# EAGLE board SensorBoard (EAGLE 5.10), part 1 of 6
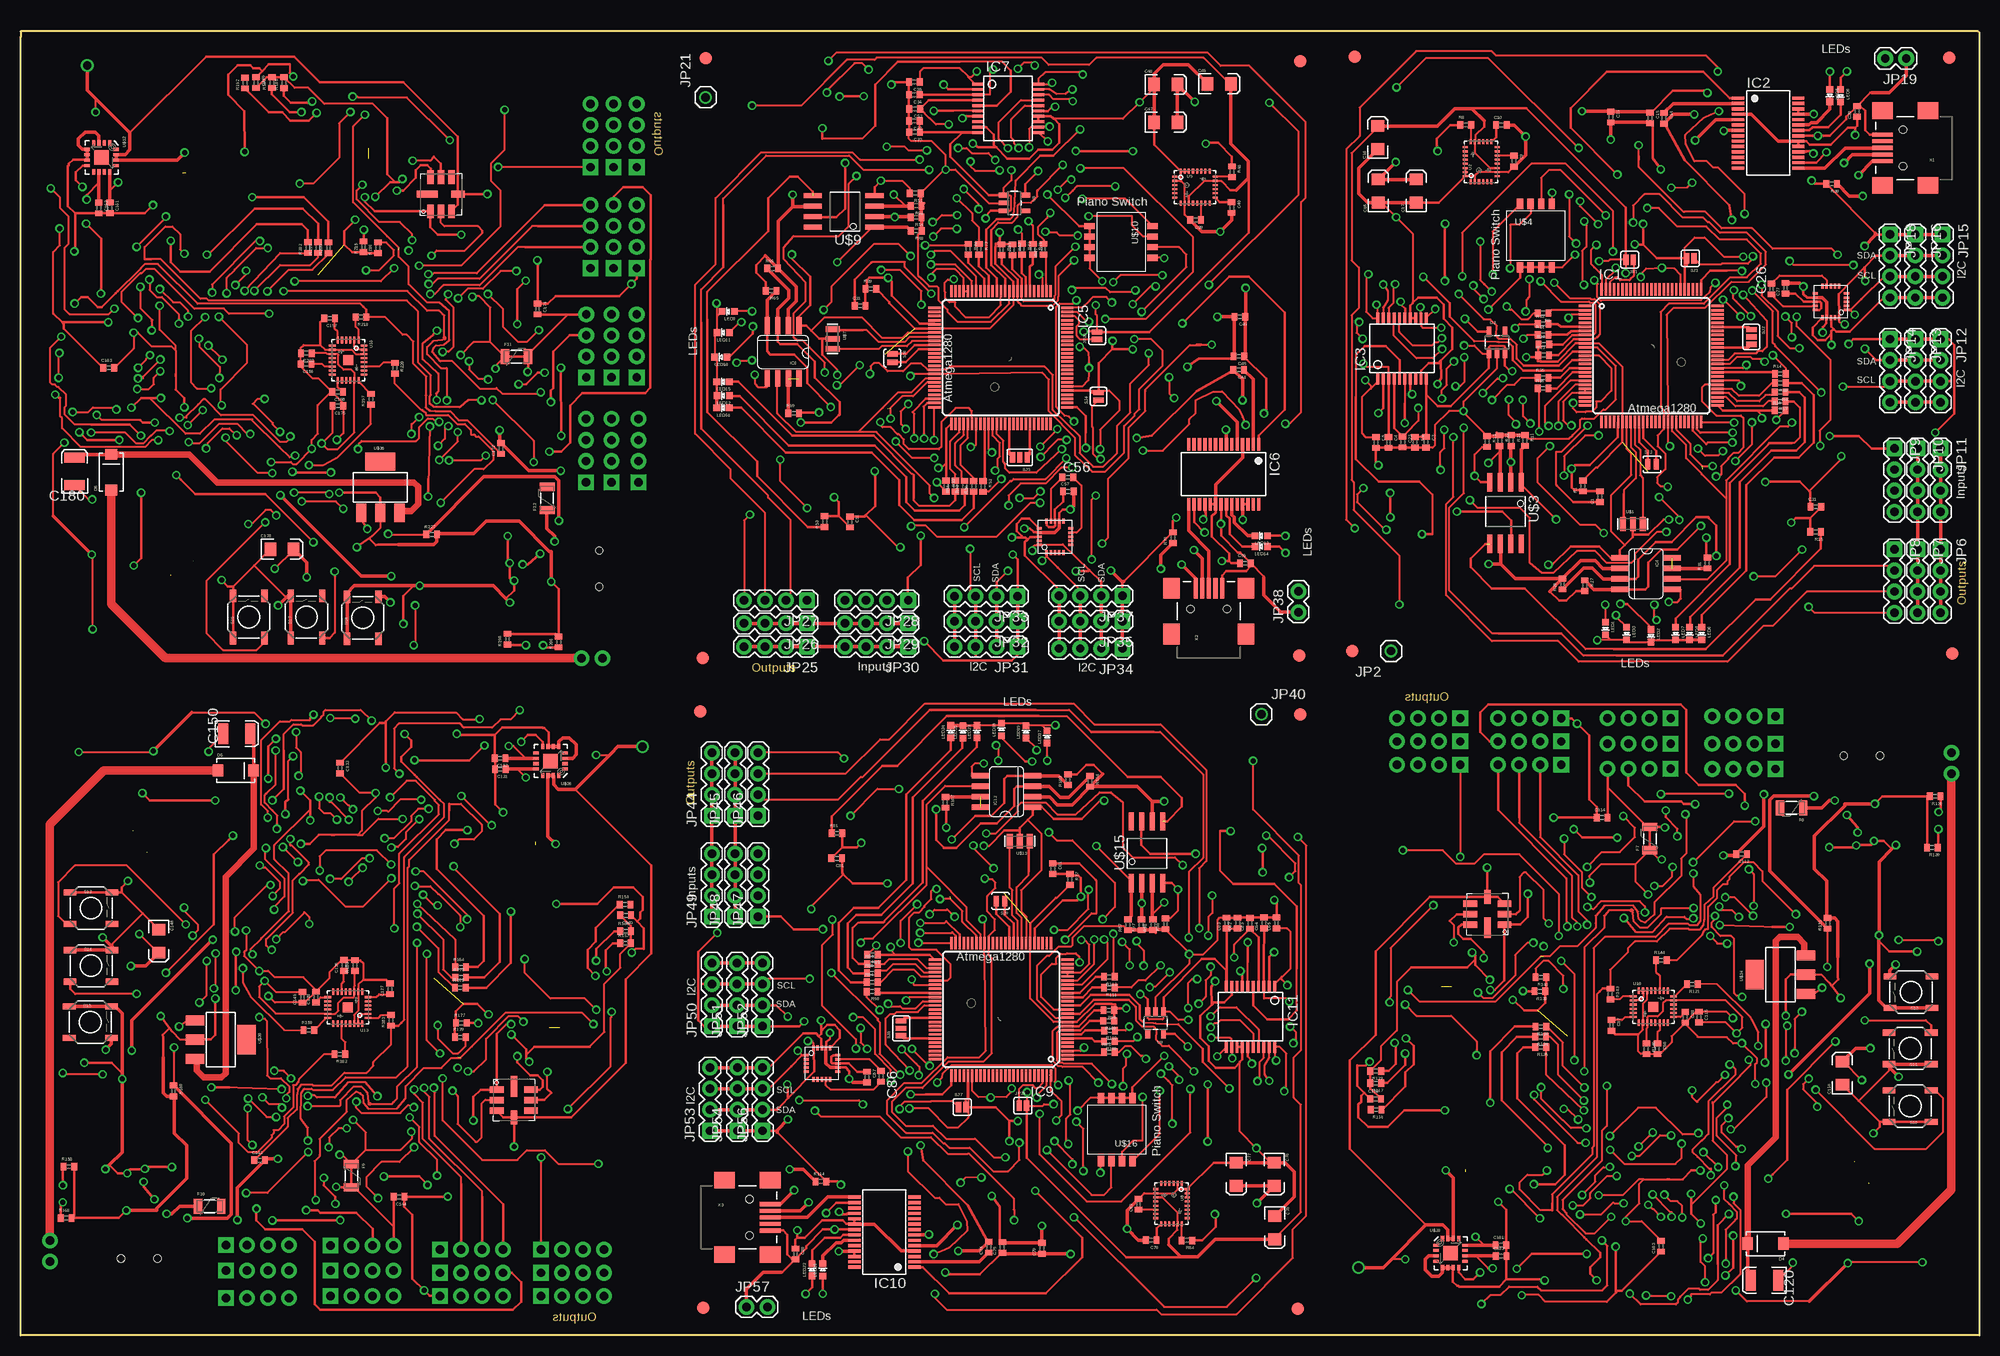
[diagram p0: board, top side]
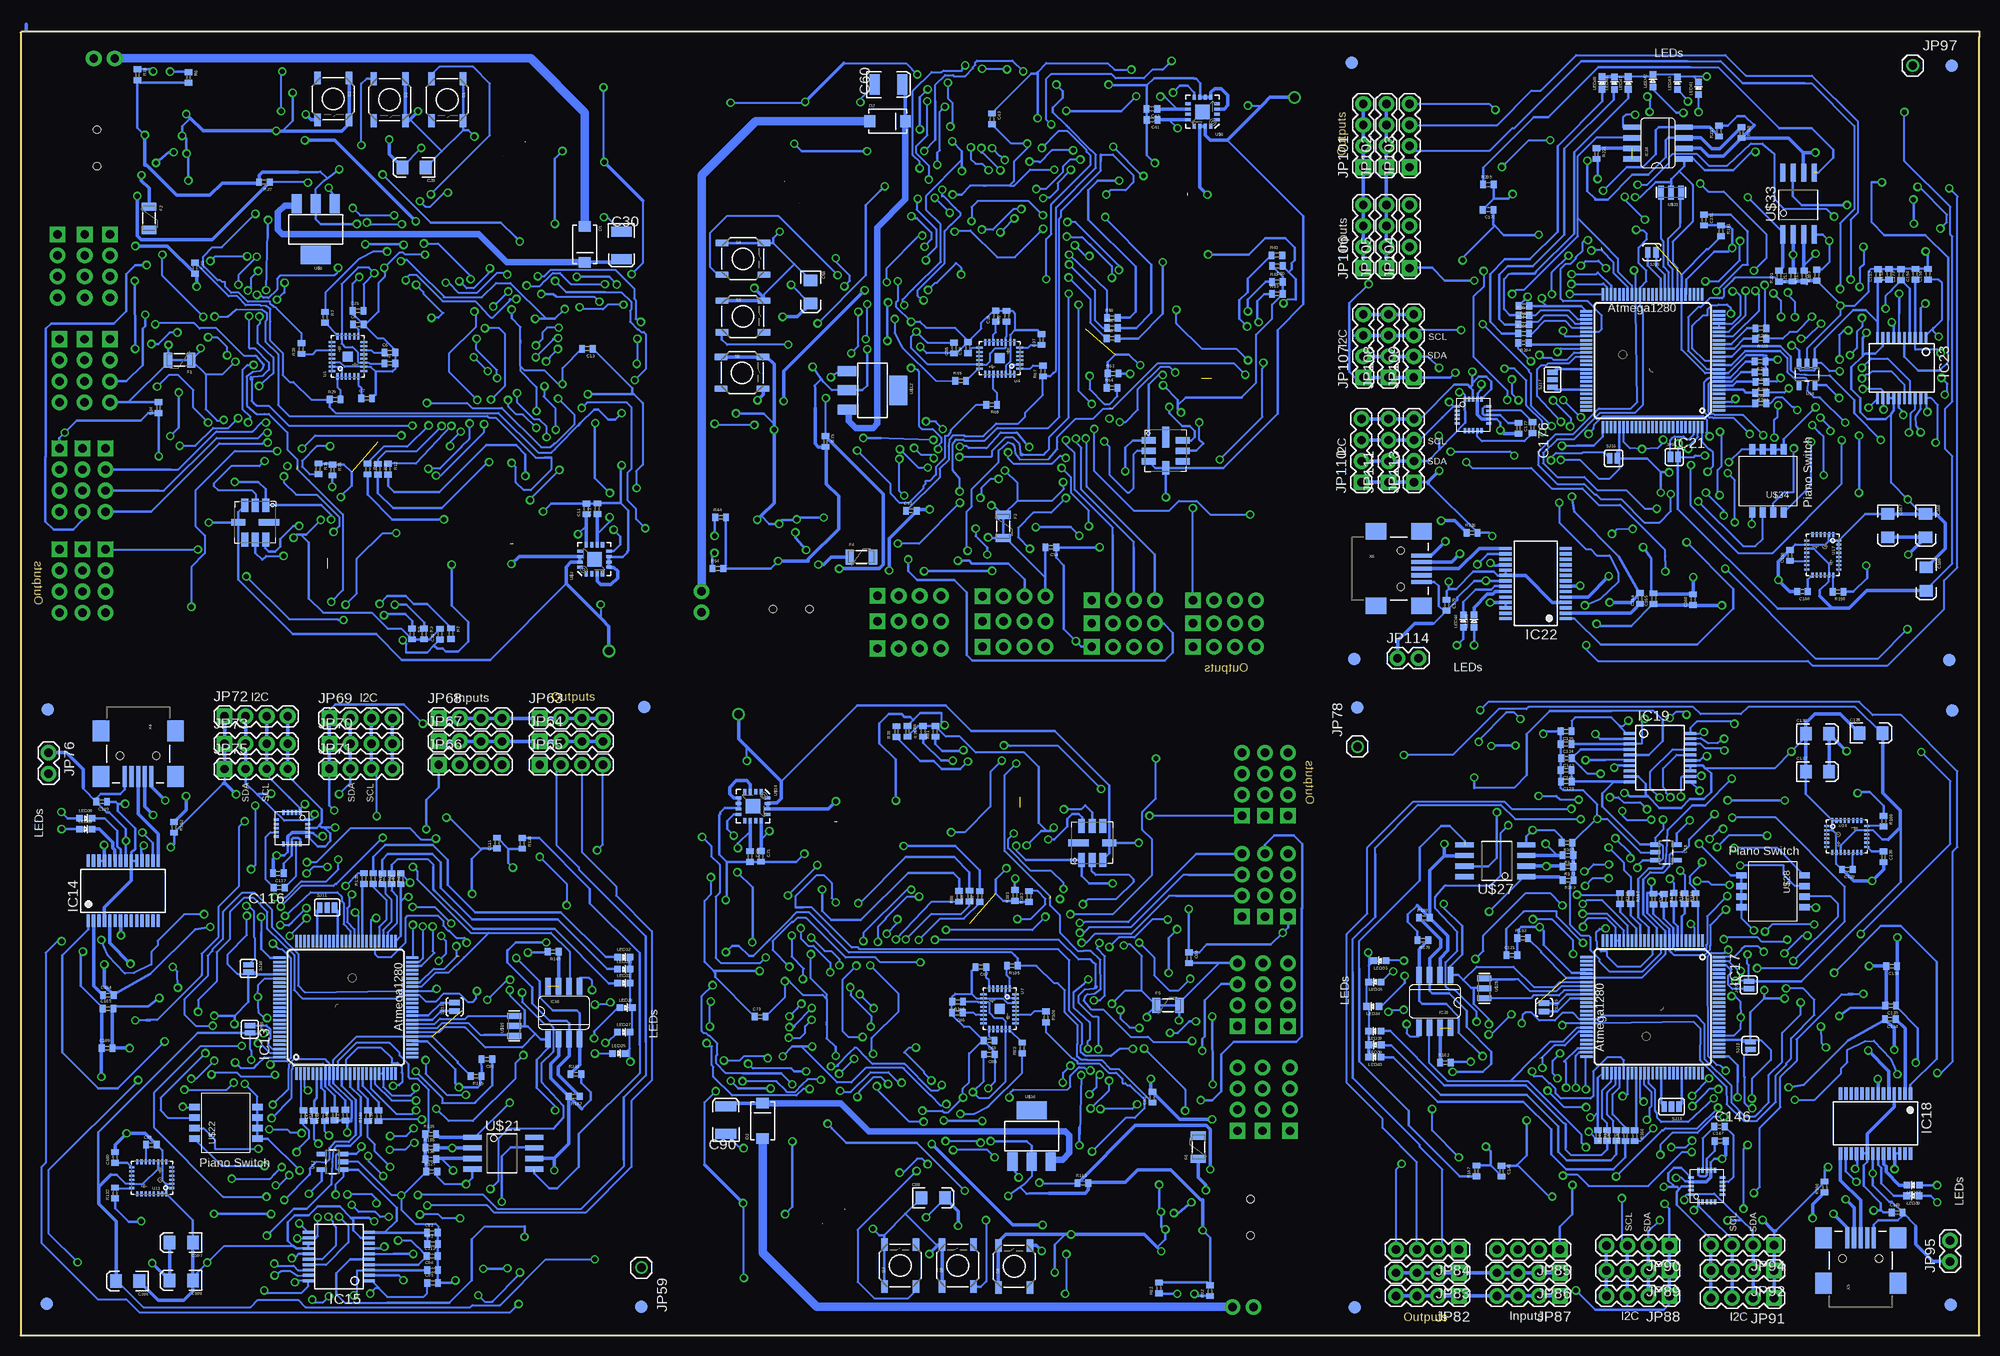
[diagram p1: board, bottom side, seen from below]

Size 236.38 x 157.44 mm. Coordinates in mm from the lower left corner, seen from the top.
Outline: 236.38,157.3 236.38,0 0,0 0,156.78
Outline: 236.25,157.44 0,157.44 0,156.74
Copper layers (1*16): Top 0.035mm / dielectric 1.5mm / Bottom 0.035mm
Design rules "default *": minimum track width 10mil, minimum drill 0.6mm, track to track 5mil, track to pad 5mil, pad to pad 5mil, via to via 5mil, smd to smd 5mil, copper to edge 40mil, drill to drill 8mil, minimum pad ring 10mil, minimum via ring 8mil, stop-mask expansion 4mil, vias tented up to drill 0mil, thermal gap 10mil

## Footprints (pad centres in the part's own frame; a part is rotated, then mirrored left to right if it is on the bottom)
C0402 = smd 0.7 x 0.9: 1 -0.65,0; 2 0.65,0
EIA3216 = smd 1.4 x 1.6: A 1.4,0; C -1.4,0
EIA3528 = smd 1.2 x 2.5: A 1.65,0; C -1.65,0
SMA-DIODE = smd 1.27 x 1.47: A -2.15,0; C 2.15,0
PTC-1206 = smd 1 x 1.8: 1 -1.4,0; 2 1.4,0
LPCC-20 = smd 0.61 x 0.305: 1 -1.9,1; 2 -1.9,0.5; 3 -1.9,0; 4 -1.9,-0.5; 5 -1.9,-1; 11 1.9,-1; 12 1.9,-0.5; 13 1.9,0; 14 1.9,0.5; 15 1.9,1 | smd 0.305 x 0.61: 6 -1,-1.9; 7 -0.5,-1.9; 8 0,-1.9; 9 0.5,-1.9; 10 1,-1.9; 16 1,1.9; 17 0.5,1.9; 18 0,1.9; 19 -0.5,1.9; 20 -1,1.9
TQFP100 = smd 1.5 x 0.3: 1 -8,6; 2 -8,5.5; 3 -8,5; 4 -8,4.5; 5 -8,4; 6 -8,3.5; 7 -8,3; 8 -8,2.5; 9 -8,2; 10 -8,1.5; 11 -8,1; 12 -8,0.5; 13 -8,0; 14 -8,-0.5; 15 -8,-1; 16 -8,-1.5; 17 -8,-2; 18 -8,-2.5; 19 -8,-3; 20 -8,-3.5; 21 -8,-4; 22 -8,-4.5; 23 -8,-5; 24 -8,-5.5; 25 -8,-6; 51 8,-6; 52 8,-5.5; 53 8,-5; 54 8,-4.5; 55 8,-4; 56 8,-3.5; 57 8,-3; 58 8,-2.5; 59 8,-2; 60 8,-1.5; 61 8,-1; 62 8,-0.5; 63 8,0; 64 8,0.5; 65 8,1; 66 8,1.5; 67 8,2; 68 8,2.5; 69 8,3; 70 8,3.5; 71 8,4; 72 8,4.5; 73 8,5; 74 8,5.5; 75 8,6 | smd 0.3 x 1.5: 26 -6,-8; 27 -5.5,-8; 28 -5,-8; 29 -4.5,-8; 30 -4,-8; 31 -3.5,-8; 32 -3,-8; 33 -2.5,-8; 34 -2,-8; 35 -1.5,-8; 36 -1,-8; 37 -0.5,-8; 38 0,-8; 39 0.5,-8; 40 1,-8; 41 1.5,-8; 42 2,-8; 43 2.5,-8; 44 3,-8; 45 3.5,-8; 46 4,-8; 47 4.5,-8; 48 5,-8; 49 5.5,-8; 50 6,-8; 76 6,8; 77 5.5,8; 78 5,8; 79 4.5,8; 80 4,8; 81 3.5,8; 82 3,8; 83 2.5,8; 84 2,8; 85 1.5,8; 86 1,8; 87 0.5,8; 88 0,8; 89 -0.5,8; 90 -1,8; 91 -1.5,8; 92 -2,8; 93 -2.5,8; 94 -3,8; 95 -3.5,8; 96 -4,8; 97 -4.5,8; 98 -5,8; 99 -5.5,8; 100 -6,8
SSOP28 = smd 0.4 x 1.5: 1 -4.225,-3.625; 2 -3.575,-3.625; 3 -2.925,-3.625; 4 -2.275,-3.625; 5 -1.625,-3.625; 6 -0.975,-3.625; 7 -0.325,-3.625; 8 0.325,-3.625; 9 0.975,-3.625; 10 1.625,-3.625; 11 2.275,-3.625; 12 2.925,-3.625; 13 3.575,-3.625; 14 4.225,-3.625; 15 4.225,3.625; 16 3.575,3.625; 17 2.925,3.625; 18 2.275,3.625; 19 1.625,3.625; 20 0.975,3.625; 21 0.325,3.625; 22 -0.325,3.625; 23 -0.975,3.625; 24 -1.625,3.625; 25 -2.275,3.625; 26 -2.925,3.625; 27 -3.575,3.625; 28 -4.225,3.625
SSOP20BU = smd 0.348 x 1.397: 1 -2.925,-3.656; 2 -2.275,-3.656; 3 -1.625,-3.656; 4 -0.975,-3.656; 5 -0.325,-3.656; 6 0.325,-3.656; 7 0.975,-3.656; 8 1.625,-3.656; 9 2.275,-3.656; 10 2.925,-3.656; 11 2.925,3.656; 12 2.275,3.656; 13 1.625,3.656; 14 0.975,3.656; 15 0.325,3.656; 16 -0.325,3.656; 17 -0.975,3.656; 18 -1.625,3.656; 19 -2.275,3.656; 20 -2.925,3.656
SOIC8 = smd 0.66 x 2.032: 1 -1.905,-3.175; 2 -0.635,-3.175; 3 0.635,-3.175; 4 1.905,-3.175; 5 1.905,3.175; 6 0.635,3.175; 7 -0.635,3.175; 8 -1.905,3.175
SJ_2S-NO = smd 0.635 x 1.27: 1 0,0; 2 0.889,0
1X01 = drill 1.016 round: 1 0,0
FIDUCIAL-1.5X3 = smd 1.5 x 1.5: 1 0,0
1X04 = drill 1.016 pad 1.88 square: 1 0,0 | drill 1.016 pad 1.88 round: 2 2.54,0; 3 5.08,0; 4 7.62,0
1X02 = drill 1.016 pad 1.88 round: 1 0,0; 2 2.54,0
LED-0603 = smd 0.8 x 0.8: A 0,-0.75; C 0,0.75
TACTILE_SWITCH_SMD = smd 1.524 x 0.762: 1 -2.54,1.905; 2 2.54,1.905; 3 -2.54,-1.905; 4 2.54,-1.905
SJ_2S = smd 0.635 x 1.27: 1 -0.45,0; 2 0.45,0
SJ_3 = smd 0.635 x 1.27: 1 -0.889,0; 2 0,0; 3 0.889,0
SJ_2S-NOTRACE = smd 0.635 x 1.27: 1 -0.508,0; 2 0.508,0
SPARKFUN_IDG500 = smd 0.8 x 0.25: 1 -2.417,1.25; 2 -2.417,0.75; 3 -2.417,0.25; 4 -2.417,-0.25; 5 -2.417,-0.75; 6 -2.417,-1.25; 15 2.433,-1.25; 16 2.433,-0.75; 17 2.433,-0.25; 18 2.433,0.25; 19 2.433,0.75; 20 2.433,1.25 | smd 0.25 x 0.8: 7 -1.742,-1.925; 8 -1.242,-1.925; 9 -0.742,-1.925; 10 -0.242,-1.925; 11 0.258,-1.925; 12 0.758,-1.925; 13 1.258,-1.925; 14 1.758,-1.925; 21 1.758,1.925; 22 1.258,1.925; 23 0.758,1.925; 24 0.258,1.925; 25 -0.242,1.925; 26 -0.742,1.925; 27 -1.242,1.925; 28 -1.742,1.925 | smd 1.2 x 1.2: NC 0,0
QFN-28_6X8 = smd 0.6 x 0.25: 1 -2.417,1.25; 2 -2.417,0.75; 3 -2.417,0.25; 4 -2.417,-0.25; 5 -2.417,-0.75; 6 -2.417,-1.25; 15 2.433,-1.25; 16 2.433,-0.75; 17 2.433,-0.25; 18 2.433,0.25; 19 2.433,0.75; 20 2.433,1.25 | smd 0.25 x 0.6: 7 -1.742,-1.925; 8 -1.242,-1.925; 9 -0.742,-1.925; 10 -0.242,-1.925; 11 0.258,-1.925; 12 0.758,-1.925; 13 1.258,-1.925; 14 1.758,-1.925; 21 1.758,1.925; 22 1.258,1.925; 23 0.758,1.925; 24 0.258,1.925; 25 -0.242,1.925; 26 -0.742,1.925; 27 -1.242,1.925; 28 -1.742,1.925
SOT23-5 = smd 0.55 x 1.2: 1 -0.95,-1.3; 2 0,-1.3; 3 0.95,-1.3; 4 0.95,1.3; 5 -0.95,1.3
RESONATOR-SMD = smd 0.7 x 1.7: 1 -1.2,0; 2 0,0; 3 1.2,0
LFCSP-16 = smd 1.75 x 1.75: 0 0,0 | smd 0.65 x 0.37: 1 -1.75,0.975; 2 -1.75,0.325; 3 -1.75,-0.325; 4 -1.75,-0.975; 9 1.75,-0.975; 10 1.75,-0.325; 11 1.75,0.325; 12 1.75,0.975 | smd 0.37 x 0.65: 5 -0.975,-1.75; 6 -0.325,-1.75; 7 0.325,-1.75; 8 0.975,-1.75; 13 0.975,1.75; 14 0.325,1.75; 15 -0.325,1.75; 16 -0.975,1.75
SO08WIDE = smd 0.61 x 2.21: 1 -1.905,-3.569; 2 -0.635,-3.569; 3 0.635,-3.569; 4 1.905,-3.569; 5 1.905,3.886; 6 0.635,3.886; 7 -0.635,3.886; 8 -1.905,3.886
CHP-041TB = smd 0.76 x 1.27: 1 -1.905,-3.81; 2 -0.635,-3.81; 3 0.635,-3.81; 4 1.905,-3.81; 5 1.905,3.81; 6 0.635,3.81; 7 -0.635,3.81; 8 -1.905,3.81
BMP085 = smd 1.67 x 0.8: 1 -2.065,1.27; 2 -2.065,0; 3 -2.065,-1.27; 5 2.065,-1.27; 6 2.065,0; 7 2.065,1.27 | smd 0.8 x 1.67: 4 0,-2.065 | smd 0.8 x 2.5: 8 0,1.65
SOT223 = smd 1.219 x 2.235: 1 -2.311,-3.099; 2 0,-3.099; 3 2.311,-3.099 | smd 3.6 x 2.2: 4 0,3.099
USB-MINIB = smd 2.5 x 0.5: D+ 2.5,0; D- 2.5,0.8; GND 2.5,-1.6; ID 2.5,-0.8; VBUS 2.5,1.6 | smd 2.5 x 2: GND@1 -3,-4.5; GND@2 -3,4.5; GND@3 2.5,4.5; GND@4 2.5,-4.5 | hole 0.9: 0,2.2; 0,-2.2

## Placement (x,y rotation side)
C1  .1uF  [C0402]  190.59,101.25 90 top
C2  .1uF  [C0402]  168.26,107.81 270 top
C3  .1uF  [C0402]  169.61,107.83 270 top
C4  .1uF  [C0402]  165.09,107.8 270 top
C5  .1uF  [C0402]  163.56,107.8 270 top
C6  .1uF  [C0402]  191.82,118.65 0 bottom
C7  .22uF  [C0402]  194.64,113.11 0 bottom
C8  .22uF  [C0402]  195.62,122.03 0 bottom
C9  .1uF  [C0402]  180.23,141.75 270 top
C10  .22uF  [C0402]  178.71,146.11 0 top
C11  .1uF  [C0402]  168.12,99.77 90 bottom
C12  .1uF  [C0402]  166.79,99.8 90 bottom
C13  .1uF  [C0402]  168,119.12 180 bottom
C14  .1uF or 240 ohms  [C0402]  198.31,146.94 270 top
C15  .1uF  [C0402]  196.67,146.97 270 top
C16  10uF  [EIA3216]  163.78,144.6 90 top
C17  10uF  [EIA3216]  168.43,138.14 90 top
C18  10uF  [EIA3216]  163.85,138.14 90 top
C19  .1uF  [C0402]  191.9,147.09 270 top
C20  .1uF  [C0402]  185.77,84.66 90 bottom
C21  .1uF  [C0402]  216.66,100.01 0 top
C22  .1uF  [C0402]  215.34,128.84 270 bottom
C23  .1uF  [C0402]  166.79,107.85 270 top
C24  1uF  [C0402]  219.74,112 90 bottom
C25  2.2uF  [C0402]  195.66,123.67 0 bottom
C26  0.22µF  [C0402]  211.29,126.31 90 top
C27  4.7uF  [C0402]  213,126.4 90 top
C28  10uF  [EIA3216]  188.89,141 180 bottom
C29  .1uF  [C0402]  221.65,147.76 90 top
C30  100uF  [EIA3528]  163.86,131.59 270 bottom
C31  .1uF  [C0402]  101.3,124.28 0 top
C32  .1uF  [C0402]  107.86,146.6 180 top
C33  .1uF  [C0402]  107.88,145.25 180 top
C34  .1uF  [C0402]  107.85,149.78 180 top
C35  .1uF  [C0402]  107.85,151.3 180 top
C36  .1uF  [C0402]  118.7,123.05 90 bottom
C37  .22uF  [C0402]  113.16,120.22 90 bottom
C38  .22uF  [C0402]  122.08,119.24 90 bottom
C39  .1uF  [C0402]  141.8,134.64 180 top
C40  .22uF  [C0402]  146.16,136.16 270 top
C41  .1uF  [C0402]  99.82,146.75 180 bottom
C42  .1uF  [C0402]  99.85,148.08 180 bottom
C43  .1uF  [C0402]  119.17,146.87 270 bottom
C44  .1uF or 240 ohms  [C0402]  146.99,116.56 180 top
C45  .1uF  [C0402]  147.02,118.2 180 top
C46  10uF  [EIA3216]  144.65,151.09 0 top
C47  10uF  [EIA3216]  138.19,146.44 0 top
C48  10uF  [EIA3216]  138.19,151.01 0 top
C49  .1uF  [C0402]  147.14,122.96 180 top
C50  .1uF  [C0402]  84.71,129.09 180 bottom
C51  .1uF  [C0402]  100.06,98.21 270 top
C52  .1uF  [C0402]  128.89,99.53 0 bottom
C53  .1uF  [C0402]  107.9,148.07 180 top
C54  1uF  [C0402]  112.05,95.12 180 bottom
C55  2.2uF  [C0402]  123.72,119.21 90 bottom
C56  0.22µF  [C0402]  126.36,103.58 0 top
C57  4.7uF  [C0402]  126.45,101.87 0 top
C58  10uF  [EIA3216]  141.05,125.97 270 bottom
C59  .1uF  [C0402]  147.81,93.22 0 top
C60  100uF  [EIA3528]  131.64,151.01 0 bottom
C61  .1uF  [C0402]  124.55,56.33 270 top
C62  .1uF  [C0402]  146.88,49.78 90 top
C63  .1uF  [C0402]  145.53,49.76 90 top
C64  .1uF  [C0402]  150.05,49.79 90 top
C65  .1uF  [C0402]  151.58,49.79 90 top
C66  .1uF  [C0402]  123.32,38.93 180 bottom
C67  .22uF  [C0402]  120.5,44.47 180 bottom
C68  .22uF  [C0402]  119.52,35.56 180 bottom
C69  .1uF  [C0402]  134.91,15.84 90 top
C70  .22uF  [C0402]  136.43,11.48 180 top
C71  .1uF  [C0402]  147.02,57.82 270 bottom
C72  .1uF  [C0402]  148.35,57.79 270 bottom
C73  .1uF  [C0402]  147.14,38.47 0 bottom
C74  .1uF or 240 ohms  [C0402]  116.83,10.65 90 top
C75  .1uF  [C0402]  118.47,10.62 90 top
C76  10uF  [EIA3216]  151.36,12.99 270 top
C77  10uF  [EIA3216]  146.71,19.44 270 top
C78  10uF  [EIA3216]  151.29,19.44 270 top
C79  .1uF  [C0402]  123.24,10.5 90 top
C80  .1uF  [C0402]  129.37,72.93 270 bottom
C81  .1uF  [C0402]  98.48,57.58 180 top
C82  .1uF  [C0402]  99.8,28.75 90 bottom
C83  .1uF  [C0402]  148.35,49.74 90 top
C84  1uF  [C0402]  95.4,45.59 270 bottom
C85  2.2uF  [C0402]  119.48,33.91 180 bottom
C86  0.22µF  [C0402]  103.85,31.27 270 top
C87  4.7uF  [C0402]  102.14,31.18 270 top
C88  10uF  [EIA3216]  126.25,16.59 0 bottom
C89  .1uF  [C0402]  93.49,9.83 270 top
C90  100uF  [EIA3528]  151.28,25.99 90 bottom
C91  .1uF  [C0402]  180.12,33.36 180 bottom
C92  .1uF  [C0402]  186.67,11.03 0 bottom
C93  .1uF  [C0402]  186.69,12.38 0 bottom
C94  .1uF  [C0402]  186.67,7.86 0 bottom
C95  .1uF  [C0402]  186.67,6.33 0 bottom
C96  .1uF  [C0402]  197.52,34.59 270 top
C97  .22uF  [C0402]  191.98,37.41 270 top
C98  .22uF  [C0402]  200.89,38.39 270 top
C99  .1uF  [C0402]  220.62,23 0 bottom
C100  .22uF  [C0402]  224.97,21.48 90 bottom
C101  .1uF  [C0402]  178.64,10.89 0 top
C102  .1uF  [C0402]  178.67,9.56 0 top
C103  .1uF  [C0402]  197.99,10.77 90 top
C104  .1uF or 240 ohms  [C0402]  225.8,41.08 0 bottom
C105  .1uF  [C0402]  225.84,39.44 0 bottom
C106  10uF  [EIA3216]  223.47,6.55 180 bottom
C107  10uF  [EIA3216]  217.01,11.2 180 bottom
C108  10uF  [EIA3216]  217.01,6.62 180 bottom
C109  .1uF  [C0402]  225.96,34.67 0 bottom
C110  .1uF  [C0402]  163.53,28.55 0 top
C111  .1uF  [C0402]  178.88,59.43 90 bottom
C112  .1uF  [C0402]  207.71,58.11 180 top
C113  .1uF  [C0402]  186.71,9.56 0 bottom
C114  1uF  [C0402]  190.87,62.52 0 top
C115  2.2uF  [C0402]  202.54,38.43 270 top
C116  0.22µF  [C0402]  205.18,54.06 180 bottom
C117  4.7uF  [C0402]  205.27,55.77 180 bottom
C118  10uF  [EIA3216]  219.86,31.66 90 top
C119  .1uF  [C0402]  226.63,64.42 180 bottom
C120  100uF  [EIA3528]  210.46,6.63 180 top
C121  .1uF  [C0402]  56.41,45.89 0 bottom
C122  .1uF  [C0402]  49.86,68.21 180 bottom
C123  .1uF  [C0402]  49.84,66.86 180 bottom
C124  .1uF  [C0402]  49.87,71.39 180 bottom
C125  .1uF  [C0402]  49.87,72.91 180 bottom
C126  .1uF  [C0402]  39.01,44.65 90 top
C127  .22uF  [C0402]  44.55,41.83 90 top
C128  .22uF  [C0402]  35.64,40.85 90 top
C129  .1uF  [C0402]  15.92,56.24 180 bottom
C130  .22uF  [C0402]  11.56,57.76 270 bottom
C131  .1uF  [C0402]  57.9,68.35 180 top
C132  .1uF  [C0402]  57.87,69.68 180 top
C133  .1uF  [C0402]  38.55,68.47 270 top
C134  .1uF or 240 ohms  [C0402]  10.73,38.16 180 bottom
C135  .1uF  [C0402]  10.69,39.81 180 bottom
C136  10uF  [EIA3216]  13.06,72.69 0 bottom
C137  10uF  [EIA3216]  19.52,68.05 0 bottom
C138  10uF  [EIA3216]  19.52,72.62 0 bottom
C139  .1uF  [C0402]  10.58,44.57 180 bottom
C140  .1uF  [C0402]  73.01,50.7 180 top
C141  .1uF  [C0402]  57.66,19.81 270 bottom
C142  .1uF  [C0402]  28.83,21.13 0 top
C143  .1uF  [C0402]  49.82,69.68 180 bottom
C144  1uF  [C0402]  45.67,16.73 180 top
C145  2.2uF  [C0402]  33.99,40.81 90 top
C146  0.22µF  [C0402]  31.35,25.18 0 bottom
C147  4.7uF  [C0402]  31.26,23.47 0 bottom
C148  10uF  [EIA3216]  16.67,47.58 270 top
C149  .1uF  [C0402]  9.91,14.83 0 bottom
C150  100uF  [EIA3528]  26.07,72.61 0 top
C151  .1uF  [C0402]  33.21,134.65 270 bottom
C152  .1uF  [C0402]  10.89,128.1 90 bottom
C153  .1uF  [C0402]  12.24,128.08 90 bottom
C154  .1uF  [C0402]  7.72,128.1 90 bottom
C155  .1uF  [C0402]  6.19,128.1 90 bottom
C156  .1uF  [C0402]  34.45,117.25 180 top
C157  .22uF  [C0402]  37.27,122.79 180 top
C158  .22uF  [C0402]  38.25,113.88 180 top
C159  .1uF  [C0402]  22.86,94.15 90 bottom
C160  .22uF  [C0402]  21.34,89.8 180 bottom
C161  .1uF  [C0402]  10.75,136.13 270 top
C162  .1uF  [C0402]  9.42,136.1 270 top
C163  .1uF  [C0402]  10.63,116.78 0 top
C164  .1uF or 240 ohms  [C0402]  40.94,88.97 90 bottom
C165  .1uF  [C0402]  39.3,88.93 90 bottom
C166  10uF  [EIA3216]  6.41,91.3 270 bottom
C167  10uF  [EIA3216]  11.06,97.76 270 bottom
C168  10uF  [EIA3216]  6.48,97.76 270 bottom
C169  .1uF  [C0402]  34.53,88.81 90 bottom
C170  .1uF  [C0402]  28.4,151.24 270 top
C171  .1uF  [C0402]  59.29,135.89 180 bottom
C172  .1uF  [C0402]  57.97,107.06 90 top
C173  .1uF  [C0402]  9.42,128.06 90 bottom
C174  1uF  [C0402]  62.37,123.9 270 top
C175  2.2uF  [C0402]  38.29,112.23 180 top
C176  0.22µF  [C0402]  53.92,109.59 270 bottom
C177  4.7uF  [C0402]  55.63,109.5 270 bottom
C178  10uF  [EIA3216]  31.52,94.91 0 top
C179  .1uF  [C0402]  64.28,88.15 270 bottom
C180  100uF  [EIA3528]  6.49,104.31 90 top
D1  [SMA-DIODE]  168.29,131.71 270 bottom
D2  [SMA-DIODE]  131.76,146.57 0 bottom
D3  [SMA-DIODE]  146.85,25.88 90 bottom
D4  [SMA-DIODE]  210.58,11.07 180 top
D5  [SMA-DIODE]  25.96,68.18 0 top
D6  [SMA-DIODE]  10.92,104.19 90 top
F1  PTC 500mA  [PTC-1206]  217.2,117.75 180 bottom
F2  PTCSMD  [PTC-1206]  220.9,134.87 270 bottom
F3  PTC 500mA  [PTC-1206]  117.8,97.66 270 bottom
F4  PTCSMD  [PTC-1206]  134.92,93.97 0 bottom
F5  PTC 500mA  [PTC-1206]  97.94,39.83 0 bottom
F6  PTCSMD  [PTC-1206]  94.24,22.72 90 bottom
F7  PTC 500mA  [PTC-1206]  196.62,59.97 90 top
F8  PTCSMD  [PTC-1206]  213.74,63.67 180 top
F9  PTC 500mA  [PTC-1206]  39.91,19.27 270 top
F10  PTCSMD  [PTC-1206]  22.8,15.57 0 top
F11  PTC 500mA  [PTC-1206]  59.83,118.15 0 top
F12  PTCSMD  [PTC-1206]  63.53,101.03 90 top
HMC1  HMC5843  [LPCC-20]  218.46,124.78 180 top
HMC2  HMC5843  [LPCC-20]  124.83,96.41 90 top
HMC3  HMC5843  [LPCC-20]  96.68,32.81 0 top
HMC4  HMC5843  [LPCC-20]  203.64,61.23 270 bottom
HMC5  HMC5843  [LPCC-20]  32.89,18.02 90 bottom
HMC6  HMC5843  [LPCC-20]  61.09,111.13 0 bottom
IC1  ATMEGA1280-16AU  [TQFP100]  196.81,118.26 0 top
IC2  FT232RL  [SSOP28]  210.9,145.14 270 top
IC3  ADS7844  [SSOP20BU]  166.73,119.13 0 top
IC4  [SOIC8]  196.16,91.95 270 top
IC5  ATMEGA1280-16AU  [TQFP100]  118.31,118.06 270 top
IC6  FT232RL  [SSOP28]  145.19,103.96 180 top
IC7  ADS7844  [SSOP20BU]  119.18,148.14 270 top
IC8  [SOIC8]  92,118.71 180 top
IC9  ATMEGA1280-16AU  [TQFP100]  118.33,39.33 180 top
IC10  FT232RL  [SSOP28]  104.24,12.45 90 top
IC11  ADS7844  [SSOP20BU]  148.41,38.46 180 top
IC12  [SOIC8]  118.98,65.63 90 top
IC13  ATMEGA1280-16AU  [TQFP100]  197.12,39.58 90 bottom
IC14  FT232RL  [SSOP28]  224.01,53.67 0 bottom
IC15  ADS7844  [SSOP20BU]  197.99,9.5 90 bottom
IC16  [SOIC8]  170.82,38.93 0 bottom
IC17  ATMEGA1280-16AU  [TQFP100]  39.41,39.66 270 bottom
IC18  FT232RL  [SSOP28]  12.53,25.57 180 bottom
IC19  ADS7844  [SSOP20BU]  38.54,69.75 270 bottom
IC20  [SOIC8]  65.71,40.31 180 bottom
IC21  ATMEGA1280-16AU  [TQFP100]  39.44,117.65 180 bottom
IC22  FT232RL  [SSOP28]  53.53,90.76 90 bottom
IC23  ADS7844  [SSOP20BU]  9.36,116.78 180 bottom
IC24  [SOIC8]  38.79,143.95 90 bottom
JP1  [SJ_2S-NO]  194.63,129.86 180 top
JP2  M01PTH  [1X01]  165.4,82.61 180 top
JP3  FIDUCIAL1.5X3  [FIDUCIAL-1.5X3]  232.78,154.24 180 top
JP4  FIDUCIAL1.5X3  [FIDUCIAL-1.5X3]  160.69,82.61 180 top
JP5  FIDUCIAL1.5X3  [FIDUCIAL-1.5X3]  233.1,82.29 180 top
JP6  [1X04]  231.72,94.87 270 top
JP7  [1X04]  228.93,94.87 270 top
JP8  [1X04]  226.13,94.87 270 top
JP9  [1X04]  226.13,107.06 270 top
JP10  [1X04]  228.93,107.06 270 top
JP11  [1X04]  231.72,107.06 270 top
JP12  [1X04]  231.72,120.27 270 top
JP13  [1X04]  228.67,120.27 270 top
JP14  [1X04]  225.62,120.27 270 top
JP15  [1X04]  231.95,132.9 270 top
JP16  [1X04]  228.65,132.9 270 top
JP17  FIDUCIAL1.5X3  [FIDUCIAL-1.5X3]  161.02,154.38 180 top
JP18  [1X04]  225.6,132.9 270 top
JP19  [1X02]  227.57,154.15 180 top
JP20  [SJ_2S-NO]  129.91,120.24 90 top
JP21  M01PTH  [1X01]  82.66,149.46 90 top
JP22  FIDUCIAL1.5X3  [FIDUCIAL-1.5X3]  154.29,82.09 90 top
JP23  FIDUCIAL1.5X3  [FIDUCIAL-1.5X3]  82.66,154.17 90 top
JP24  FIDUCIAL1.5X3  [FIDUCIAL-1.5X3]  82.34,81.76 90 top
JP25  [1X04]  94.92,83.15 180 top
JP26  [1X04]  94.92,85.94 180 top
JP27  [1X04]  94.92,88.73 180 top
JP28  [1X04]  107.11,88.73 180 top
JP29  [1X04]  107.11,85.94 180 top
JP30  [1X04]  107.11,83.15 180 top
JP31  [1X04]  120.32,83.15 180 top
JP32  [1X04]  120.32,86.19 180 top
JP33  [1X04]  120.32,89.24 180 top
JP34  [1X04]  132.95,82.92 180 top
JP35  [1X04]  132.95,86.22 180 top
JP36  FIDUCIAL1.5X3  [FIDUCIAL-1.5X3]  154.43,153.85 90 top
JP37  [1X04]  132.95,89.27 180 top
JP38  [1X02]  154.2,87.3 90 top
JP39  [SJ_2S-NO]  120.51,27.73 0 top
JP40  M01PTH  [1X01]  149.74,74.98 0 top
JP41  FIDUCIAL1.5X3  [FIDUCIAL-1.5X3]  82.36,3.35 0 top
JP42  FIDUCIAL1.5X3  [FIDUCIAL-1.5X3]  154.45,74.98 0 top
JP43  FIDUCIAL1.5X3  [FIDUCIAL-1.5X3]  82.04,75.3 0 top
JP44  [1X04]  83.42,62.72 90 top
JP45  [1X04]  86.21,62.72 90 top
JP46  [1X04]  89.01,62.72 90 top
JP47  [1X04]  89.01,50.52 90 top
JP48  [1X04]  86.21,50.52 90 top
JP49  [1X04]  83.42,50.52 90 top
JP50  [1X04]  83.42,37.32 90 top
JP51  [1X04]  86.47,37.32 90 top
JP52  [1X04]  89.52,37.32 90 top
JP53  [1X04]  83.19,24.69 90 top
JP54  [1X04]  86.49,24.69 90 top
JP55  FIDUCIAL1.5X3  [FIDUCIAL-1.5X3]  154.12,3.21 0 top
JP56  [1X04]  89.54,24.69 90 top
JP57  [1X02]  87.57,3.43 0 top
JP58  [SJ_2S-NO]  208.73,37.4 270 bottom
JP59  M01PTH  [1X01]  161.48,8.17 270 bottom
JP60  FIDUCIAL1.5X3  [FIDUCIAL-1.5X3]  233.11,75.55 270 bottom
JP61  FIDUCIAL1.5X3  [FIDUCIAL-1.5X3]  161.48,3.46 270 bottom
JP62  FIDUCIAL1.5X3  [FIDUCIAL-1.5X3]  161.15,75.87 270 bottom
JP63  [1X04]  173.74,74.49 0 bottom
JP64  [1X04]  173.74,71.7 0 bottom
JP65  [1X04]  173.74,68.9 0 bottom
JP66  [1X04]  185.93,68.9 0 bottom
JP67  [1X04]  185.93,71.7 0 bottom
JP68  [1X04]  185.93,74.49 0 bottom
JP69  [1X04]  199.14,74.49 0 bottom
JP70  [1X04]  199.14,71.44 0 bottom
JP71  [1X04]  199.14,68.39 0 bottom
JP72  [1X04]  211.77,74.72 0 bottom
JP73  [1X04]  211.77,71.42 0 bottom
JP74  FIDUCIAL1.5X3  [FIDUCIAL-1.5X3]  233.24,3.79 270 bottom
JP75  [1X04]  211.77,68.37 0 bottom
JP76  [1X02]  233.02,70.34 270 bottom
JP77  [SJ_2S-NO]  27.81,41.85 90 bottom
JP78  M01PTH  [1X01]  75.06,71.07 90 bottom
JP79  FIDUCIAL1.5X3  [FIDUCIAL-1.5X3]  3.43,3.69 90 bottom
JP80  FIDUCIAL1.5X3  [FIDUCIAL-1.5X3]  75.06,75.78 90 bottom
JP81  FIDUCIAL1.5X3  [FIDUCIAL-1.5X3]  75.38,3.37 90 bottom
JP82  [1X04]  62.8,4.75 180 bottom
JP83  [1X04]  62.8,7.55 180 bottom
JP84  [1X04]  62.8,10.34 180 bottom
JP85  [1X04]  50.6,10.34 180 bottom
JP86  [1X04]  50.6,7.55 180 bottom
JP87  [1X04]  50.6,4.75 180 bottom
JP88  [1X04]  37.4,4.75 180 bottom
JP89  [1X04]  37.4,7.8 180 bottom
JP90  [1X04]  37.4,10.85 180 bottom
JP91  [1X04]  24.76,4.52 180 bottom
JP92  [1X04]  24.76,7.82 180 bottom
JP93  FIDUCIAL1.5X3  [FIDUCIAL-1.5X3]  3.29,75.46 90 bottom
JP94  [1X04]  24.76,10.87 180 bottom
JP95  [1X02]  3.51,8.9 90 bottom
JP96  [SJ_2S-NO]  37.26,106.04 0 bottom
JP97  M01PTH  [1X01]  8.03,153.29 0 bottom
JP98  FIDUCIAL1.5X3  [FIDUCIAL-1.5X3]  75.41,81.66 0 bottom
JP99  FIDUCIAL1.5X3  [FIDUCIAL-1.5X3]  3.32,153.29 0 bottom
JP100  FIDUCIAL1.5X3  [FIDUCIAL-1.5X3]  75.73,153.62 0 bottom
JP101  [1X04]  74.35,141.03 90 bottom
JP102  [1X04]  71.56,141.03 90 bottom
JP103  [1X04]  68.76,141.03 90 bottom
JP104  [1X04]  68.76,128.84 90 bottom
JP105  [1X04]  71.56,128.84 90 bottom
JP106  [1X04]  74.35,128.84 90 bottom
JP107  [1X04]  74.35,115.63 90 bottom
JP108  [1X04]  71.3,115.63 90 bottom
JP109  [1X04]  68.25,115.63 90 bottom
JP110  [1X04]  74.58,103 90 bottom
JP111  [1X04]  71.28,103 90 bottom
JP112  FIDUCIAL1.5X3  [FIDUCIAL-1.5X3]  3.64,81.53 0 bottom
JP113  [1X04]  68.23,103 90 bottom
JP114  [1X02]  70.2,81.75 0 bottom
LED1  RED  [LED-0603]  191.26,85.33 180 top
LED2  BLUE  [LED-0603]  196.77,84.45 180 top
LED3  BLUE  [LED-0603]  193.81,84.73 180 top
LED4  YELLOW  [LED-0603]  201.41,84.73 180 top
LED5  ORANGE  [LED-0603]  218.34,149.68 180 top
LED6  ORANGE  [LED-0603]  219.64,149.66 180 top
LED7  GREEN  [LED-0603]  199.74,84.71 180 top
LED8  RED  [LED-0603]  202.89,84.71 180 top
LED9  RED  [LED-0603]  85.38,123.61 90 top
LED10  BLUE  [LED-0603]  84.5,118.1 90 top
LED11  BLUE  [LED-0603]  84.78,121.05 90 top
LED12  YELLOW  [LED-0603]  84.78,113.45 90 top
LED13  ORANGE  [LED-0603]  149.73,96.53 90 top
LED14  ORANGE  [LED-0603]  149.71,95.23 90 top
LED15  GREEN  [LED-0603]  84.76,115.13 90 top
LED16  RED  [LED-0603]  84.76,111.98 90 top
LED17  RED  [LED-0603]  123.88,72.25 0 top
LED18  BLUE  [LED-0603]  118.37,73.13 0 top
LED19  BLUE  [LED-0603]  121.33,72.86 0 top
LED20  YELLOW  [LED-0603]  113.73,72.85 0 top
LED21  ORANGE  [LED-0603]  96.8,7.91 0 top
LED22  ORANGE  [LED-0603]  95.5,7.93 0 top
LED23  GREEN  [LED-0603]  115.4,72.88 0 top
LED24  RED  [LED-0603]  112.25,72.88 0 top
LED25  RED  [LED-0603]  164.2,34.03 270 bottom
LED26  BLUE  [LED-0603]  163.32,39.54 270 bottom
LED27  BLUE  [LED-0603]  163.6,36.58 270 bottom
LED28  YELLOW  [LED-0603]  163.6,44.18 270 bottom
LED29  ORANGE  [LED-0603]  228.55,61.11 270 bottom
LED30  ORANGE  [LED-0603]  228.53,62.41 270 bottom
LED31  GREEN  [LED-0603]  163.58,42.51 270 bottom
LED32  RED  [LED-0603]  163.58,45.66 270 bottom
LED33  RED  [LED-0603]  72.33,45.22 90 bottom
LED34  BLUE  [LED-0603]  73.21,39.71 90 bottom
LED35  BLUE  [LED-0603]  72.94,42.66 90 bottom
LED36  YELLOW  [LED-0603]  72.93,35.06 90 bottom
LED37  ORANGE  [LED-0603]  7.99,18.13 90 bottom
LED38  ORANGE  [LED-0603]  8.01,16.84 90 bottom
LED39  GREEN  [LED-0603]  72.96,36.73 90 bottom
LED40  RED  [LED-0603]  72.96,33.58 90 bottom
LED41  RED  [LED-0603]  33.89,150.57 0 bottom
LED42  BLUE  [LED-0603]  39.4,151.45 0 bottom
LED43  BLUE  [LED-0603]  36.44,151.17 0 bottom
LED44  YELLOW  [LED-0603]  44.04,151.17 0 bottom
LED45  ORANGE  [LED-0603]  60.97,86.22 0 bottom
LED46  ORANGE  [LED-0603]  62.27,86.25 0 bottom
LED47  GREEN  [LED-0603]  42.37,151.19 0 bottom
LED48  RED  [LED-0603]  45.52,151.19 0 bottom
R1  10k  [C0402]  188.53,102.55 90 top
R2  1k  [C0402]  184.46,84.71 270 bottom
R3  1k  [C0402]  187.68,84.67 270 bottom
R4  1k  [C0402]  212.35,113.87 180 top
R5  1k  [C0402]  189.15,84.67 270 bottom
R6  1k  [C0402]  216.12,151.86 270 bottom
R7  750  [C0402]  199.64,122.9 270 bottom
R8  750  [C0402]  174.4,146.12 0 top
R9  1k  [C0402]  183.75,123.41 180 top
R10  4.7k  [C0402]  194.51,104.61 270 bottom
R11  10k  [C0402]  181.53,108.03 270 top
R12  4.7k  [C0402]  192.03,104.58 270 bottom
R13  10k  [C0402]  176.99,107.91 270 top
R14  4.7k  [C0402]  212.38,116.08 0 top
R15  1k  [C0402]  216.62,96.98 180 top
R16  1k  [C0402]  222.3,152.19 270 bottom
R17  1k  [C0402]  212.34,112.76 180 top
R18  1k  [C0402]  212.37,114.97 180 top
R19  1k  [C0402]  212.34,111.65 0 top
R20  4.7k  [C0402]  193.26,104.57 270 bottom
R21  10k  [C0402]  179.89,108.02 270 top
R22  10k  [C0402]  178.49,108.01 270 top
R23  10k  [C0402]  183.81,118.33 0 top
R24  10k  [C0402]  183.82,119.63 0 top
R25  10k  [C0402]  198.75,104.48 270 bottom
R26  10k  [C0402]  200.47,104.61 270 bottom
R27  10k  [C0402]  188.76,90.51 270 top
R28  10k  [C0402]  186.08,90.71 90 top
R29  750  [C0402]  198.44,112.98 0 bottom
R30  750  [C0402]  202.52,119.15 90 bottom
R31  200k  [C0402]  203.55,93.24 90 top
R32  750  [C0402]  191.84,117.33 0 bottom
R33  1k  [C0402]  183.75,122.1 0 top
R34  1k  [C0402]  183.73,120.79 0 top
R35  1k  [C0402]  183.74,115.6 0 top
R36  1k  [C0402]  183.74,114.31 0 top
R37  240  [C0402]  206.96,139.22 180 bottom
R38  720  [C0402]  218.57,139.01 180 top
R39  10k  [C0402]  102.6,126.34 0 top
R40  1k  [C0402]  84.76,130.4 0 bottom
R41  1k  [C0402]  84.72,127.18 0 bottom
R42  1k  [C0402]  113.92,102.52 90 top
R43  1k  [C0402]  84.72,125.72 0 bottom
R44  1k  [C0402]  151.91,98.75 0 bottom
R45  750  [C0402]  122.95,115.23 0 bottom
R46  750  [C0402]  146.18,140.46 270 top
R47  1k  [C0402]  123.46,131.12 90 top
R48  4.7k  [C0402]  104.66,120.36 0 bottom
R49  10k  [C0402]  108.08,133.34 180 top
R50  4.7k  [C0402]  104.63,122.84 0 bottom
R51  10k  [C0402]  107.96,137.88 180 top
R52  4.7k  [C0402]  116.13,102.49 270 top
R53  1k  [C0402]  97.03,98.24 90 top
R54  1k  [C0402]  152.24,92.57 0 bottom
R55  1k  [C0402]  112.81,102.53 90 top
R56  1k  [C0402]  115.02,102.5 90 top
R57  1k  [C0402]  111.7,102.53 270 top
R58  4.7k  [C0402]  104.62,121.6 0 bottom
R59  10k  [C0402]  108.07,134.97 180 top
R60  10k  [C0402]  108.06,136.37 180 top
R61  10k  [C0402]  118.38,131.06 270 top
R62  10k  [C0402]  119.68,131.04 270 top
R63  10k  [C0402]  104.53,116.11 0 bottom
R64  10k  [C0402]  104.66,114.4 0 bottom
R65  10k  [C0402]  90.56,126.1 180 top
R66  10k  [C0402]  90.76,128.79 0 top
R67  750  [C0402]  113.03,116.43 90 bottom
R68  750  [C0402]  119.2,112.35 180 bottom
R69  200k  [C0402]  93.29,111.31 0 top
R70  750  [C0402]  117.38,123.03 90 bottom
R71  1k  [C0402]  122.15,131.12 270 top
R72  1k  [C0402]  120.84,131.14 270 top
R73  1k  [C0402]  115.65,131.12 270 top
R74  1k  [C0402]  114.36,131.13 270 top
R75  240  [C0402]  139.27,107.91 270 bottom
R76  720  [C0402]  139.06,96.3 90 top
R77  10k  [C0402]  126.61,55.04 270 top
R78  1k  [C0402]  130.68,72.88 90 bottom
R79  1k  [C0402]  127.46,72.92 90 bottom
R80  1k  [C0402]  102.79,43.71 0 top
R81  1k  [C0402]  125.99,72.91 90 bottom
R82  1k  [C0402]  99.02,5.73 90 bottom
R83  750  [C0402]  115.5,34.69 90 bottom
R84  750  [C0402]  140.74,11.46 180 top
R85  1k  [C0402]  131.39,34.18 0 top
R86  4.7k  [C0402]  120.63,52.98 90 bottom
R87  10k  [C0402]  133.61,49.55 90 top
R88  4.7k  [C0402]  123.11,53 90 bottom
R89  10k  [C0402]  138.15,49.68 90 top
R90  4.7k  [C0402]  102.76,41.51 180 top
R91  1k  [C0402]  98.52,60.61 0 top
R92  1k  [C0402]  92.84,5.4 90 bottom
R93  1k  [C0402]  102.8,44.83 0 top
R94  1k  [C0402]  102.77,42.62 0 top
R95  1k  [C0402]  102.8,45.94 180 top
R96  4.7k  [C0402]  121.88,53.02 90 bottom
R97  10k  [C0402]  135.25,49.57 90 top
R98  10k  [C0402]  136.65,49.58 90 top
R99  10k  [C0402]  131.33,39.25 180 top
R100  10k  [C0402]  131.32,37.96 180 top
R101  10k  [C0402]  116.39,53.1 90 bottom
R102  10k  [C0402]  114.67,52.98 90 bottom
R103  10k  [C0402]  126.38,67.08 90 top
R104  10k  [C0402]  129.06,66.88 270 top
R105  750  [C0402]  116.7,44.61 180 bottom
R106  750  [C0402]  112.62,38.44 270 bottom
R107  200k  [C0402]  111.59,64.35 270 top
R108  750  [C0402]  123.3,40.26 180 bottom
R109  1k  [C0402]  131.39,35.49 180 top
R110  1k  [C0402]  131.41,36.79 180 top
R111  1k  [C0402]  131.4,41.98 180 top
R112  1k  [C0402]  131.4,43.28 180 top
R113  240  [C0402]  108.18,18.37 0 bottom
R114  720  [C0402]  96.57,18.58 0 top
R115  10k  [C0402]  181.42,31.3 180 bottom
R116  1k  [C0402]  163.58,27.23 180 top
R117  1k  [C0402]  163.54,30.45 180 top
R118  1k  [C0402]  192.74,55.12 270 bottom
R119  1k  [C0402]  163.54,31.92 180 top
R120  1k  [C0402]  230.73,58.89 180 top
R121  750  [C0402]  201.77,42.41 180 top
R122  750  [C0402]  224.99,17.17 90 bottom
R123  1k  [C0402]  202.27,26.52 270 bottom
R124  4.7k  [C0402]  183.47,37.28 180 top
R125  10k  [C0402]  186.9,24.3 0 bottom
R126  4.7k  [C0402]  183.45,34.8 180 top
R127  10k  [C0402]  186.77,19.76 0 bottom
R128  4.7k  [C0402]  194.95,55.15 90 bottom
R129  1k  [C0402]  175.85,59.39 270 bottom
R130  1k  [C0402]  231.06,65.07 180 top
R131  1k  [C0402]  191.63,55.11 270 bottom
R132  1k  [C0402]  193.83,55.14 270 bottom
R133  1k  [C0402]  190.51,55.11 90 bottom
R134  4.7k  [C0402]  183.44,36.03 180 top
R135  10k  [C0402]  186.88,22.66 0 bottom
R136  10k  [C0402]  186.88,21.26 0 bottom
R137  10k  [C0402]  197.2,26.58 90 bottom
R138  10k  [C0402]  198.5,26.59 90 bottom
R139  10k  [C0402]  183.35,41.52 180 top
R140  10k  [C0402]  183.48,43.24 180 top
R141  10k  [C0402]  169.38,31.53 0 bottom
R142  10k  [C0402]  169.57,28.85 180 bottom
R143  750  [C0402]  191.84,41.21 270 top
R144  750  [C0402]  198.01,45.29 0 top
R145  200k  [C0402]  172.11,46.32 180 bottom
R146  750  [C0402]  196.2,34.61 270 top
R147  1k  [C0402]  200.97,26.52 90 bottom
R148  1k  [C0402]  199.66,26.5 90 bottom
R149  1k  [C0402]  194.47,26.51 90 bottom
R150  1k  [C0402]  193.18,26.51 90 bottom
R151  240  [C0402]  218.08,49.73 90 top
R152  720  [C0402]  217.88,61.34 270 bottom
R153  10k  [C0402]  55.12,47.94 0 bottom
R154  1k  [C0402]  72.96,52.01 0 top
R155  1k  [C0402]  73,48.79 0 top
R156  1k  [C0402]  43.79,24.12 90 bottom
R157  1k  [C0402]  72.99,47.33 0 top
R158  1k  [C0402]  5.81,20.36 0 top
R159  750  [C0402]  34.77,36.84 0 top
R160  750  [C0402]  11.54,62.07 270 bottom
R161  1k  [C0402]  34.26,52.72 90 bottom
R162  4.7k  [C0402]  53.06,41.96 0 top
R163  10k  [C0402]  49.63,54.94 180 bottom
R164  4.7k  [C0402]  53.08,44.45 0 top
R165  10k  [C0402]  49.76,59.49 180 bottom
R166  4.7k  [C0402]  41.59,24.09 270 bottom
R167  1k  [C0402]  60.68,19.85 90 bottom
R168  1k  [C0402]  5.48,14.17 0 top
R169  1k  [C0402]  44.91,24.13 90 bottom
R170  1k  [C0402]  42.7,24.1 90 bottom
R171  1k  [C0402]  46.02,24.13 270 bottom
R172  4.7k  [C0402]  53.1,43.21 0 top
R173  10k  [C0402]  49.65,56.58 180 bottom
R174  10k  [C0402]  49.66,57.98 180 bottom
R175  10k  [C0402]  39.33,52.66 270 bottom
R176  10k  [C0402]  38.04,52.65 270 bottom
R177  10k  [C0402]  53.18,37.72 0 top
R178  10k  [C0402]  53.05,36.01 0 top
R179  10k  [C0402]  67.16,47.71 180 bottom
R180  10k  [C0402]  66.96,50.39 0 bottom
R181  750  [C0402]  44.69,38.03 90 top
R182  750  [C0402]  38.52,33.95 180 top
R183  200k  [C0402]  64.43,32.92 0 bottom
R184  750  [C0402]  40.34,44.63 90 top
R185  1k  [C0402]  35.57,52.72 270 bottom
R186  1k  [C0402]  36.87,52.74 270 bottom
R187  1k  [C0402]  42.06,52.73 270 bottom
R188  1k  [C0402]  43.36,52.73 270 bottom
R189  240  [C0402]  18.45,29.51 270 top
R190  720  [C0402]  18.66,17.9 90 bottom
R191  10k  [C0402]  31.16,133.35 270 bottom
R192  1k  [C0402]  27.09,151.19 90 top
R193  1k  [C0402]  30.31,151.23 90 top
R194  1k  [C0402]  54.98,122.03 0 bottom
R195  1k  [C0402]  31.78,151.23 90 top
R196  1k  [C0402]  58.75,84.04 90 top
R197  750  [C0402]  42.26,113 90 top
R198  750  [C0402]  17.03,89.78 180 bottom
R199  1k  [C0402]  26.38,112.5 0 bottom
R200  4.7k  [C0402]  37.14,131.3 90 top
R201  10k  [C0402]  24.16,127.87 90 bottom
R202  4.7k  [C0402]  34.66,131.32 90 top
R203  10k  [C0402]  19.62,128 90 bottom
R204  4.7k  [C0402]  55.01,119.82 180 bottom
R205  1k  [C0402]  59.25,138.92 0 bottom
R206  1k  [C0402]  64.93,83.71 90 top
R207  1k  [C0402]  54.97,123.14 0 bottom
R208  1k  [C0402]  55,120.94 0 bottom
R209  1k  [C0402]  54.97,124.26 180 bottom
R210  4.7k  [C0402]  35.89,131.33 90 top
R211  10k  [C0402]  22.52,127.89 90 bottom
R212  10k  [C0402]  21.12,127.89 90 bottom
R213  10k  [C0402]  26.44,117.57 180 bottom
R214  10k  [C0402]  26.45,116.27 180 bottom
R215  10k  [C0402]  41.38,131.42 90 top
R216  10k  [C0402]  43.1,131.29 90 top
R217  10k  [C0402]  31.39,145.39 90 bottom
R218  10k  [C0402]  28.71,145.2 270 bottom
R219  750  [C0402]  41.07,122.93 180 top
R220  750  [C0402]  45.15,116.76 270 top
R221  200k  [C0402]  46.18,142.66 270 bottom
R222  750  [C0402]  34.47,118.57 180 top
R223  1k  [C0402]  26.38,113.8 180 bottom
R224  1k  [C0402]  26.36,115.11 180 bottom
R225  1k  [C0402]  26.37,120.3 180 bottom
R226  1k  [C0402]  26.37,121.59 180 bottom
R227  240  [C0402]  49.59,96.69 0 top
R228  720  [C0402]  61.2,96.89 0 bottom
S1  [TACTILE_SWITCH_SMD]  184.9,149.17 270 bottom
S2  [TACTILE_SWITCH_SMD]  191.86,149.17 270 bottom
S3  [TACTILE_SWITCH_SMD]  198.66,149.27 270 bottom
S4  [TACTILE_SWITCH_SMD]  149.22,129.96 0 bottom
S5  [TACTILE_SWITCH_SMD]  149.22,123.01 0 bottom
S6  [TACTILE_SWITCH_SMD]  149.32,116.2 0 bottom
S7  [TACTILE_SWITCH_SMD]  130.24,8.41 90 bottom
S8  [TACTILE_SWITCH_SMD]  123.28,8.41 90 bottom
S9  [TACTILE_SWITCH_SMD]  116.48,8.32 90 bottom
S10  [TACTILE_SWITCH_SMD]  228.04,27.67 180 top
S11  [TACTILE_SWITCH_SMD]  228.04,34.63 180 top
S12  [TACTILE_SWITCH_SMD]  228.14,41.43 180 top
S13  [TACTILE_SWITCH_SMD]  8.49,51.57 0 top
S14  [TACTILE_SWITCH_SMD]  8.49,44.61 0 top
S15  [TACTILE_SWITCH_SMD]  8.4,37.81 0 top
S16  [TACTILE_SWITCH_SMD]  27.53,86.73 90 top
S17  [TACTILE_SWITCH_SMD]  34.49,86.73 90 top
S18  [TACTILE_SWITCH_SMD]  41.29,86.63 90 top
SJ1  SJ2  [SJ_2S]  201.51,130.03 180 top
SJ2  [SJ_3]  208.87,120.53 270 top
SJ3  SOLDERJUMPERNC3  [SJ_2S-NOTRACE]  196.88,105.15 0 top
SJ4  SJ2  [SJ_2S]  130.08,113.36 90 top
SJ5  [SJ_3]  120.58,105.99 180 top
SJ6  SOLDERJUMPERNC3  [SJ_2S-NOTRACE]  105.2,117.98 270 top
SJ7  SJ2  [SJ_2S]  113.63,27.56 0 top
SJ8  [SJ_3]  106.27,37.06 90 top
SJ9  SOLDERJUMPERNC3  [SJ_2S-NOTRACE]  118.26,52.44 180 top
SJ10  SJ2  [SJ_2S]  208.89,44.28 270 bottom
SJ11  [SJ_3]  199.4,51.64 0 bottom
SJ12  SOLDERJUMPERNC3  [SJ_2S-NOTRACE]  184.02,39.65 90 bottom
SJ13  SJ2  [SJ_2S]  27.64,34.96 90 bottom
SJ14  [SJ_3]  37.14,27.6 180 bottom
SJ15  SOLDERJUMPERNC3  [SJ_2S-NOTRACE]  52.52,39.59 270 bottom
SJ16  SJ2  [SJ_2S]  44.14,105.88 0 bottom
SJ17  [SJ_3]  51.5,115.37 90 bottom
SJ18  SOLDERJUMPERNC3  [SJ_2S-NOTRACE]  39.51,130.75 180 bottom
U1  IDG500  [SPARKFUN_IDG500]  196.9,118.17 90 bottom
U2  ISZ500SMD  [QFN-28_6X8]  176.25,141.67 90 top
U3  3V3-2  [SOT23-5]  178.17,119.87 0 top
U4  IDG500  [SPARKFUN_IDG500]  118.22,117.97 180 bottom
U5  ISZ500SMD  [QFN-28_6X8]  141.72,138.62 0 top
U6  3V3-2  [SOT23-5]  119.92,136.7 270 top
U7  IDG500  [SPARKFUN_IDG500]  118.24,39.42 270 bottom
U8  ISZ500SMD  [QFN-28_6X8]  138.89,15.91 270 top
U9  3V3-2  [SOT23-5]  136.97,37.72 180 top
U10  IDG500  [SPARKFUN_IDG500]  197.04,39.67 0 top
U11  ISZ500SMD  [QFN-28_6X8]  220.54,19.02 180 bottom
U12  3V3-2  [SOT23-5]  198.74,20.94 90 bottom
U13  IDG500  [SPARKFUN_IDG500]  39.5,39.57 180 top
U14  ISZ500SMD  [QFN-28_6X8]  15.99,60.22 0 bottom
U15  3V3-2  [SOT23-5]  37.8,58.3 270 bottom
U16  IDG500  [SPARKFUN_IDG500]  39.53,117.73 270 top
U17  ISZ500SMD  [QFN-28_6X8]  18.88,94.23 270 bottom
U18  3V3-2  [SOT23-5]  20.8,116.03 180 bottom
U$1  16MHZ  [RESONATOR-SMD]  194.57,97.93 0 top
U$2  ADXL335  [LFCSP-16]  167.14,93.71 90 bottom
U$3  DF  [SO08WIDE]  179.2,99.43 180 top
U$4  CHP-041TB  [CHP-041TB]  182.87,132.76 0 top
U$5  BMP085  [BMP085]  208.08,98.14 270 bottom
U$6  LM317-5V  [SOT223]  200.77,133.52 180 bottom
U$7  16MHZ  [RESONATOR-SMD]  97.98,120.29 270 top
U$8  ADXL335  [LFCSP-16]  93.76,147.73 180 bottom
U$9  DF  [SO08WIDE]  99.48,135.67 90 top
U$10  CHP-041TB  [CHP-041TB]  132.81,132 270 top
U$11  BMP085  [BMP085]  98.19,106.79 0 bottom
U$12  LM317-5V  [SOT223]  133.57,114.09 270 bottom
U$13  16MHZ  [RESONATOR-SMD]  120.56,59.65 180 top
U$14  ADXL335  [LFCSP-16]  148,63.88 270 bottom
U$15  DF  [SO08WIDE]  135.94,58.16 0 top
U$16  CHP-041TB  [CHP-041TB]  132.27,24.83 180 top
U$17  BMP085  [BMP085]  107.06,59.45 90 bottom
U$18  LM317-5V  [SOT223]  114.37,24.06 0 bottom
U$19  16MHZ  [RESONATOR-SMD]  176.8,37.35 90 bottom
U$20  ADXL335  [LFCSP-16]  172.57,9.91 0 top
U$21  DF  [SO08WIDE]  178.3,21.97 270 bottom
U$22  CHP-041TB  [CHP-041TB]  211.62,25.64 90 bottom
U$23  BMP085  [BMP085]  177.01,50.85 180 top
U$24  LM317-5V  [SOT223]  212.39,43.54 90 top
U$25  16MHZ  [RESONATOR-SMD]  59.73,41.9 270 bottom
U$26  ADXL335  [LFCSP-16]  63.96,69.33 180 top
U$27  DF  [SO08WIDE]  58.24,57.27 90 bottom
U$28  CHP-041TB  [CHP-041TB]  24.91,53.6 270 bottom
U$29  BMP085  [BMP085]  59.53,28.4 0 top
U$30  LM317-5V  [SOT223]  24.14,35.7 270 top
U$31  16MHZ  [RESONATOR-SMD]  37.2,137.97 180 bottom
U$32  ADXL335  [LFCSP-16]  9.77,142.2 270 top
U$33  DF  [SO08WIDE]  21.83,136.47 0 bottom
U$34  CHP-041TB  [CHP-041TB]  25.5,103.15 180 bottom
U$35  BMP085  [BMP085]  50.71,137.76 90 top
U$36  LM317-5V  [SOT223]  43.4,102.38 0 top
X1  USBSMD  [USB-MINIB]  227.19,143.35 180 top
X2  USBSMD  [USB-MINIB]  143.4,87.68 90 top
X3  USBSMD  [USB-MINIB]  87.95,14.24 0 top
X4  USBSMD  [USB-MINIB]  222.21,69.96 270 bottom
X5  USBSMD  [USB-MINIB]  14.32,9.28 90 bottom
X6  USBSMD  [USB-MINIB]  69.82,92.56 0 bottom

## Library data of the parts
C1-C25 C27-C55 C57-C85 C87-C115 C117-C145 C147-C175 C177-C180 D1-D6 F1-F12 JP1 JP2 JP20 JP21 JP39 JP40 JP58 JP59 JP77 JP78 JP96 JP97 LED1-LED48 R1-R228 S1-S18 SJ1-SJ18 U$1-U$3 U$6-U$9 U$12-U$15 U$18-U$21 U$24-U$27 U$30-U$33 U$36 X1-X6 = DIYdrones3
C26 C56 C86 C116 C146 C176 = rcl
HMC1-HMC6 = hmc5843
IC1 IC5 IC9 IC13 IC17 IC21 = atmel-2010
IC2 IC6 IC10 IC14 IC18 IC22 = ftdichip
IC3 IC7 IC11 IC15 IC19 IC23 = burr-brown
IC4 IC8 IC12 IC16 IC20 IC24 U$4 U$10 U$16 U$22 U$28 U$34 = DIYdrones
JP3-JP18 JP22-JP37 JP41-JP56 JP60-JP75 JP79-JP94 JP98-JP113 U1-U18 U$5 U$11 U$17 U$23 U$29 U$35 = SparkFun
JP19 JP38 JP57 JP76 JP95 JP114 = SparkFunv2